# Altium PCB PCBProyectoFinal.PcbDoc
Units mil, origin at the board's own origin, x right, y up, seen from the top; angles counter-clockwise.
Board outline 3600 x 3600 mil, 2 copper layers (Top Layer, Bottom Layer); 53 components, 52 nets, 245 pads, 34 vias.
Unrouted connection lines stored in the file: 52.
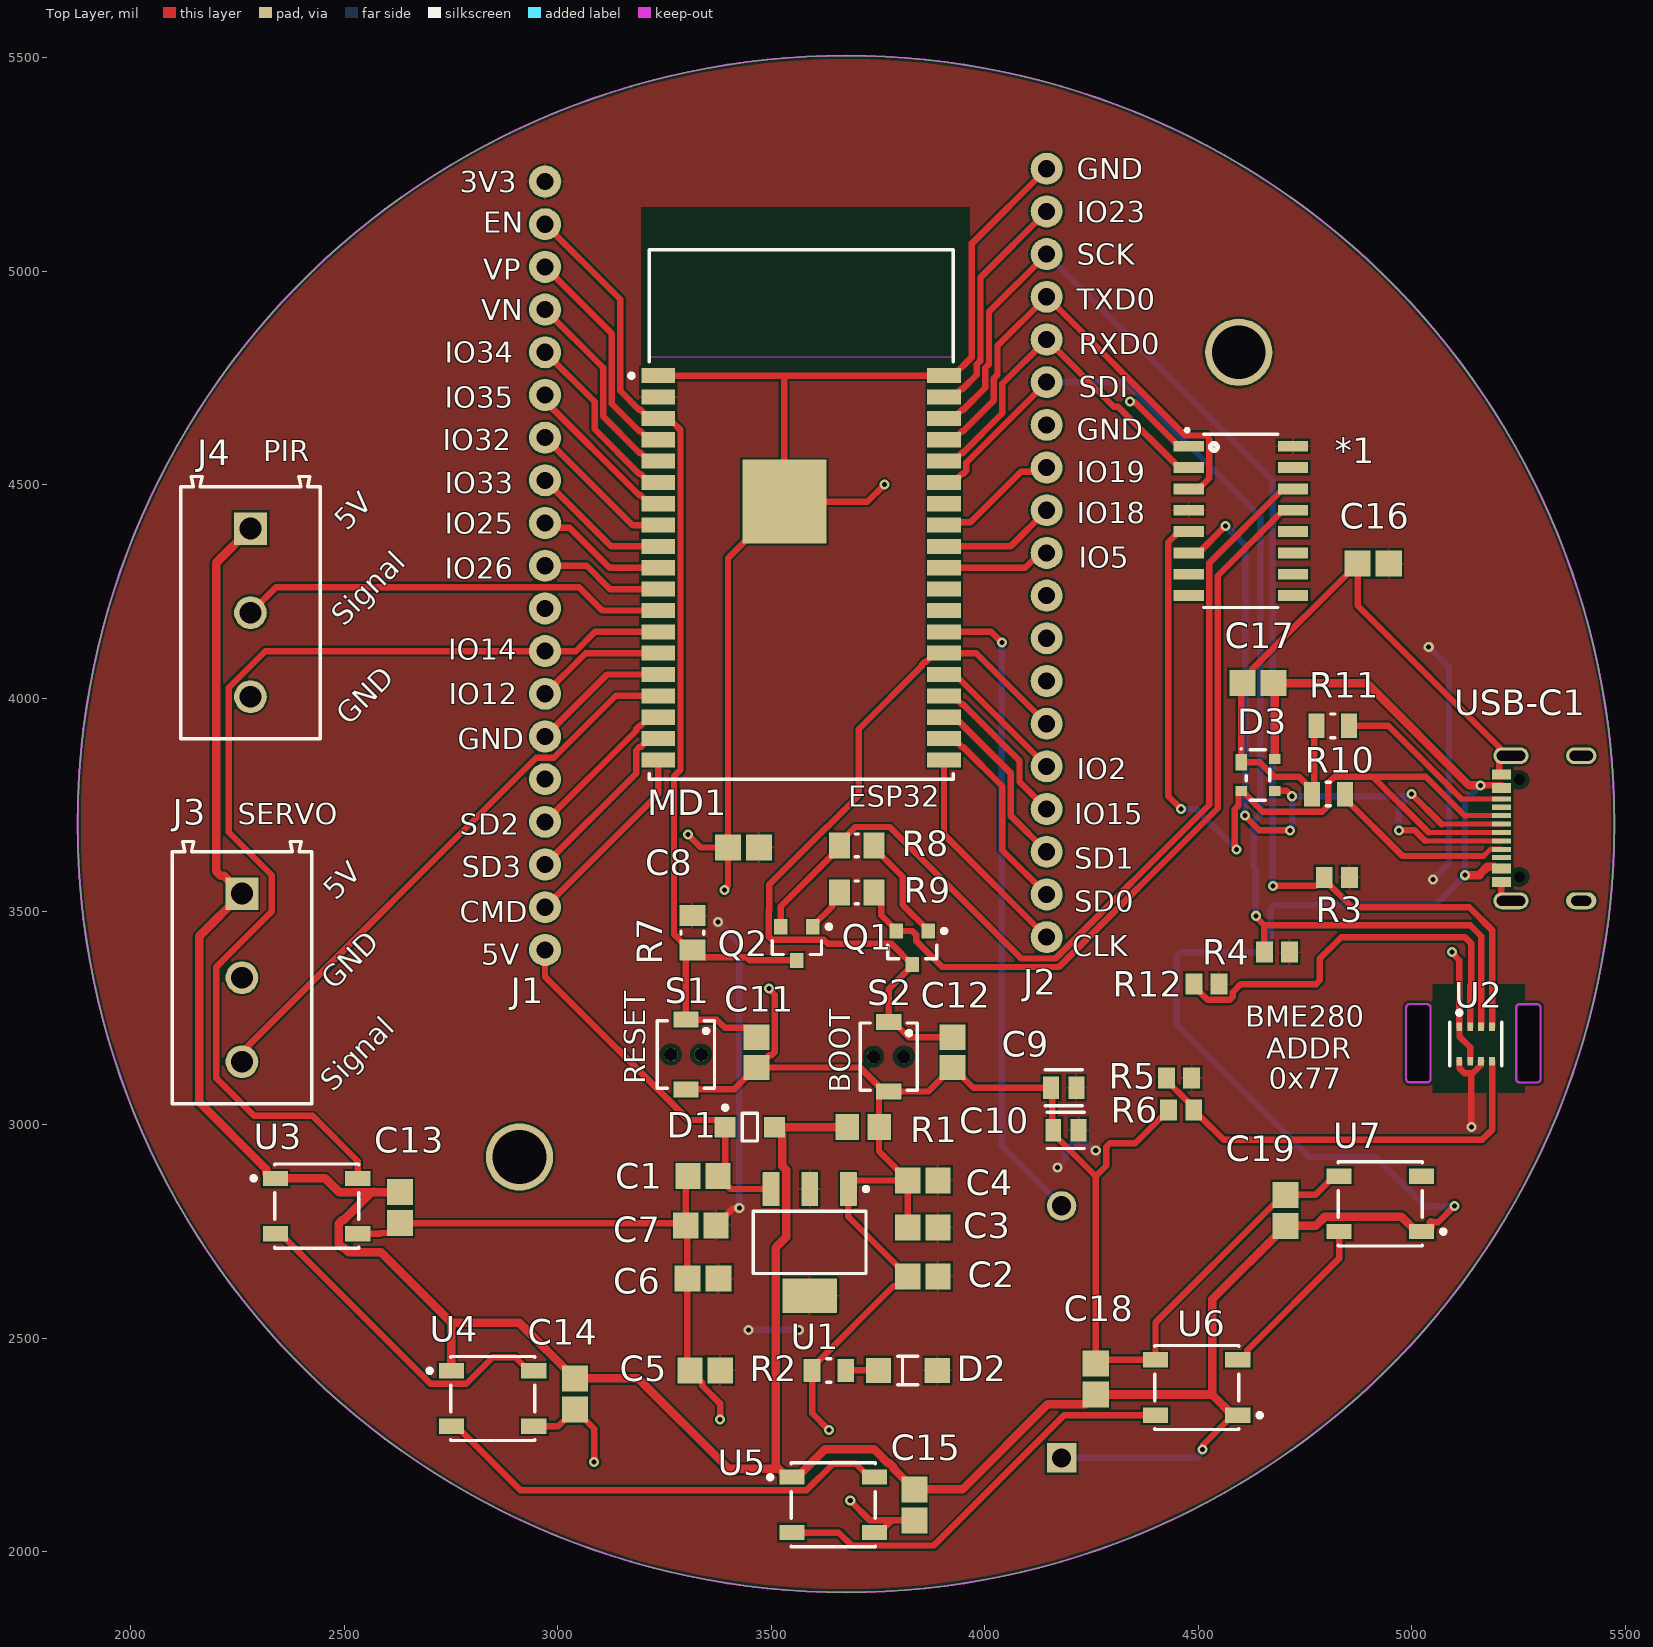
[diagram p0: Top Layer view]
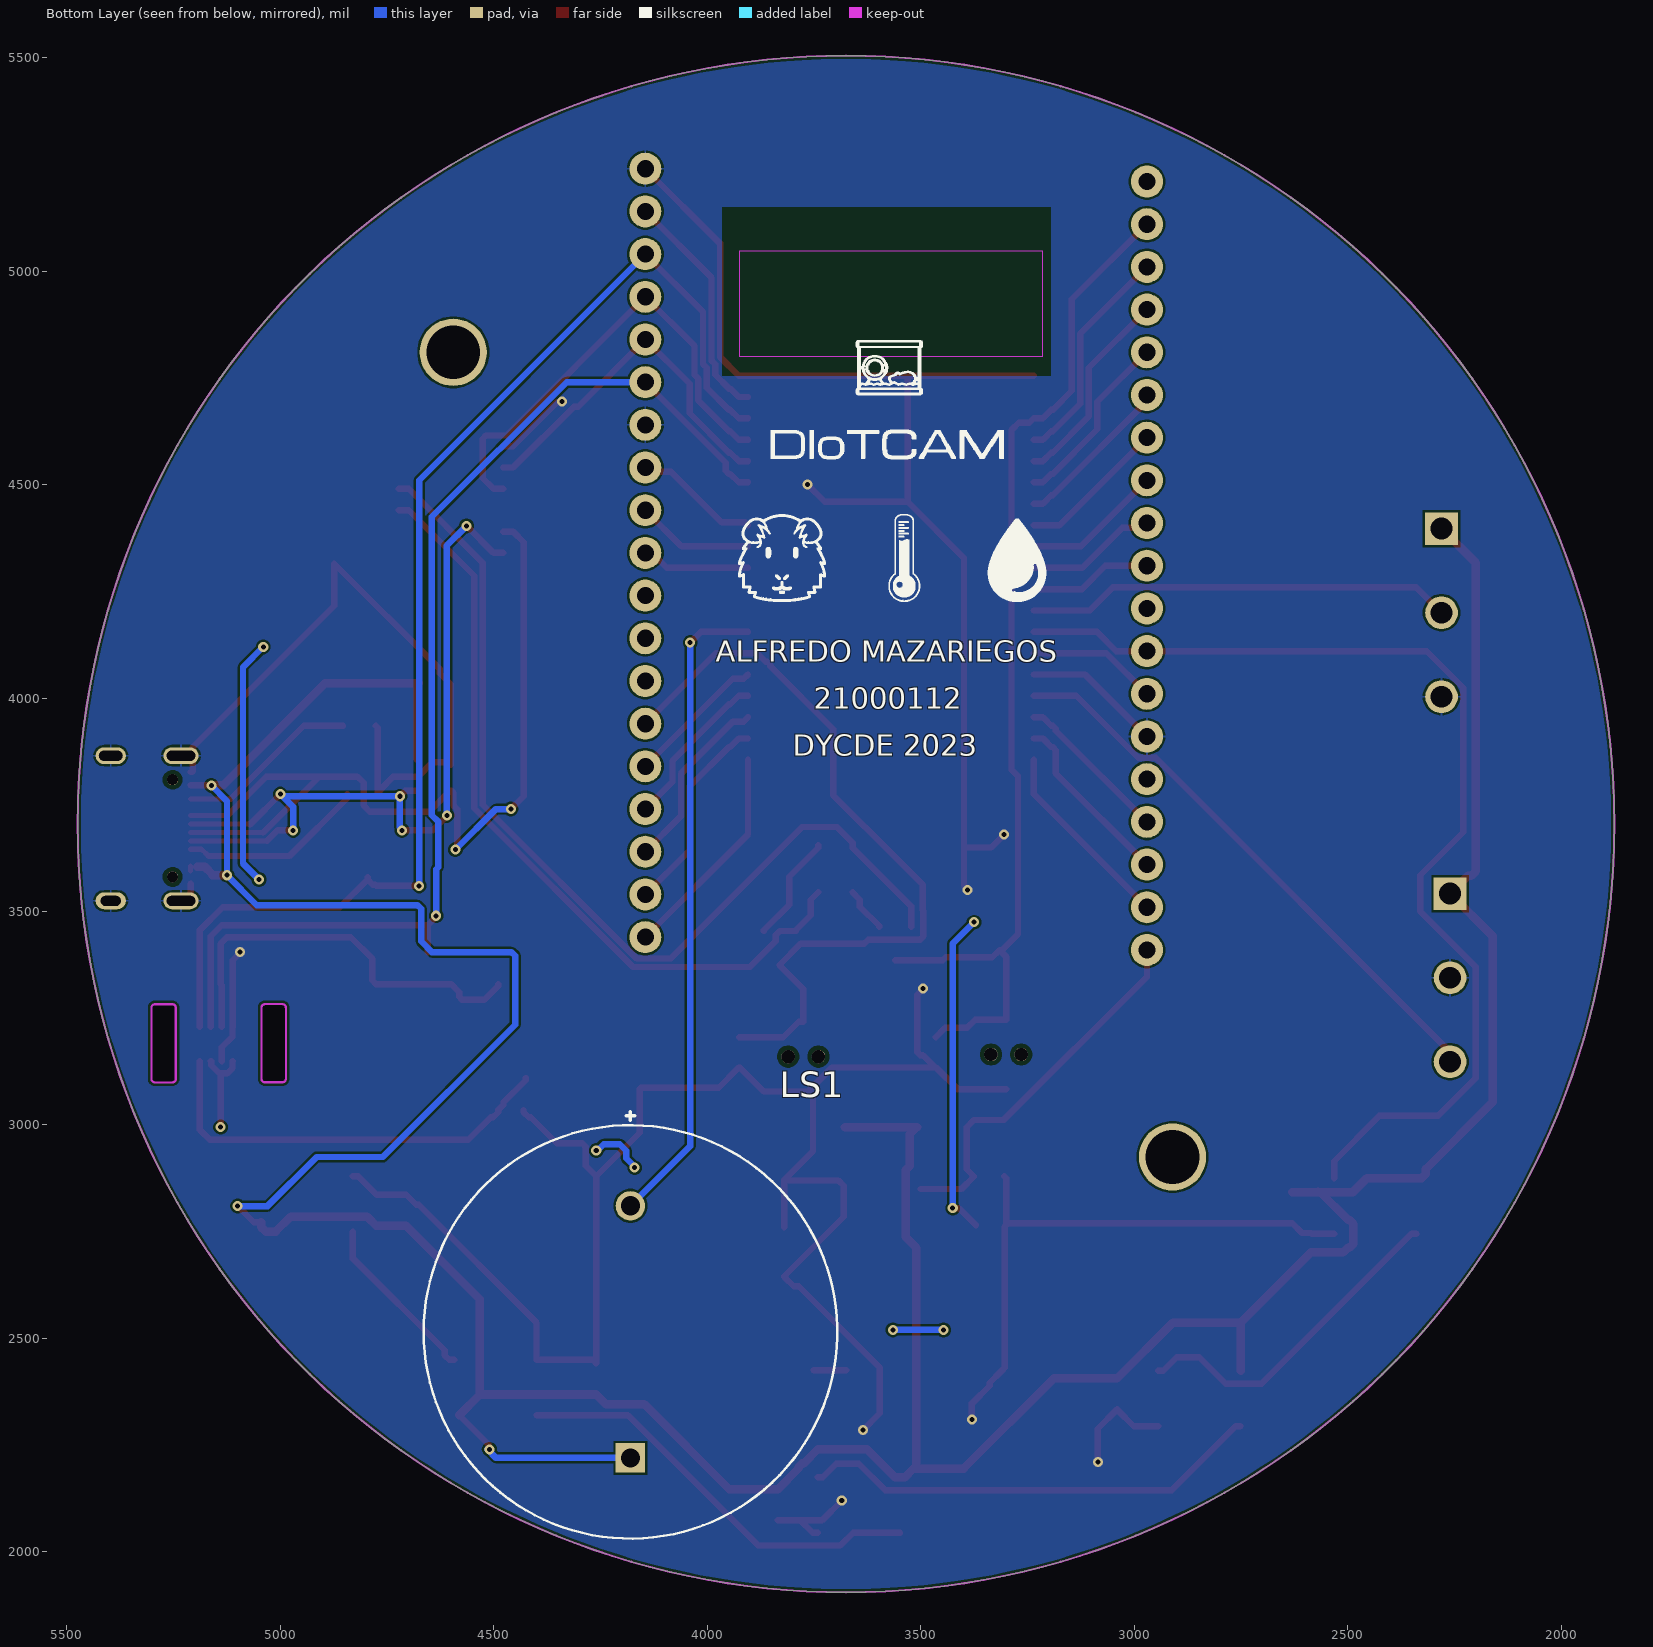
[diagram p1: Bottom Layer view, seen from below]
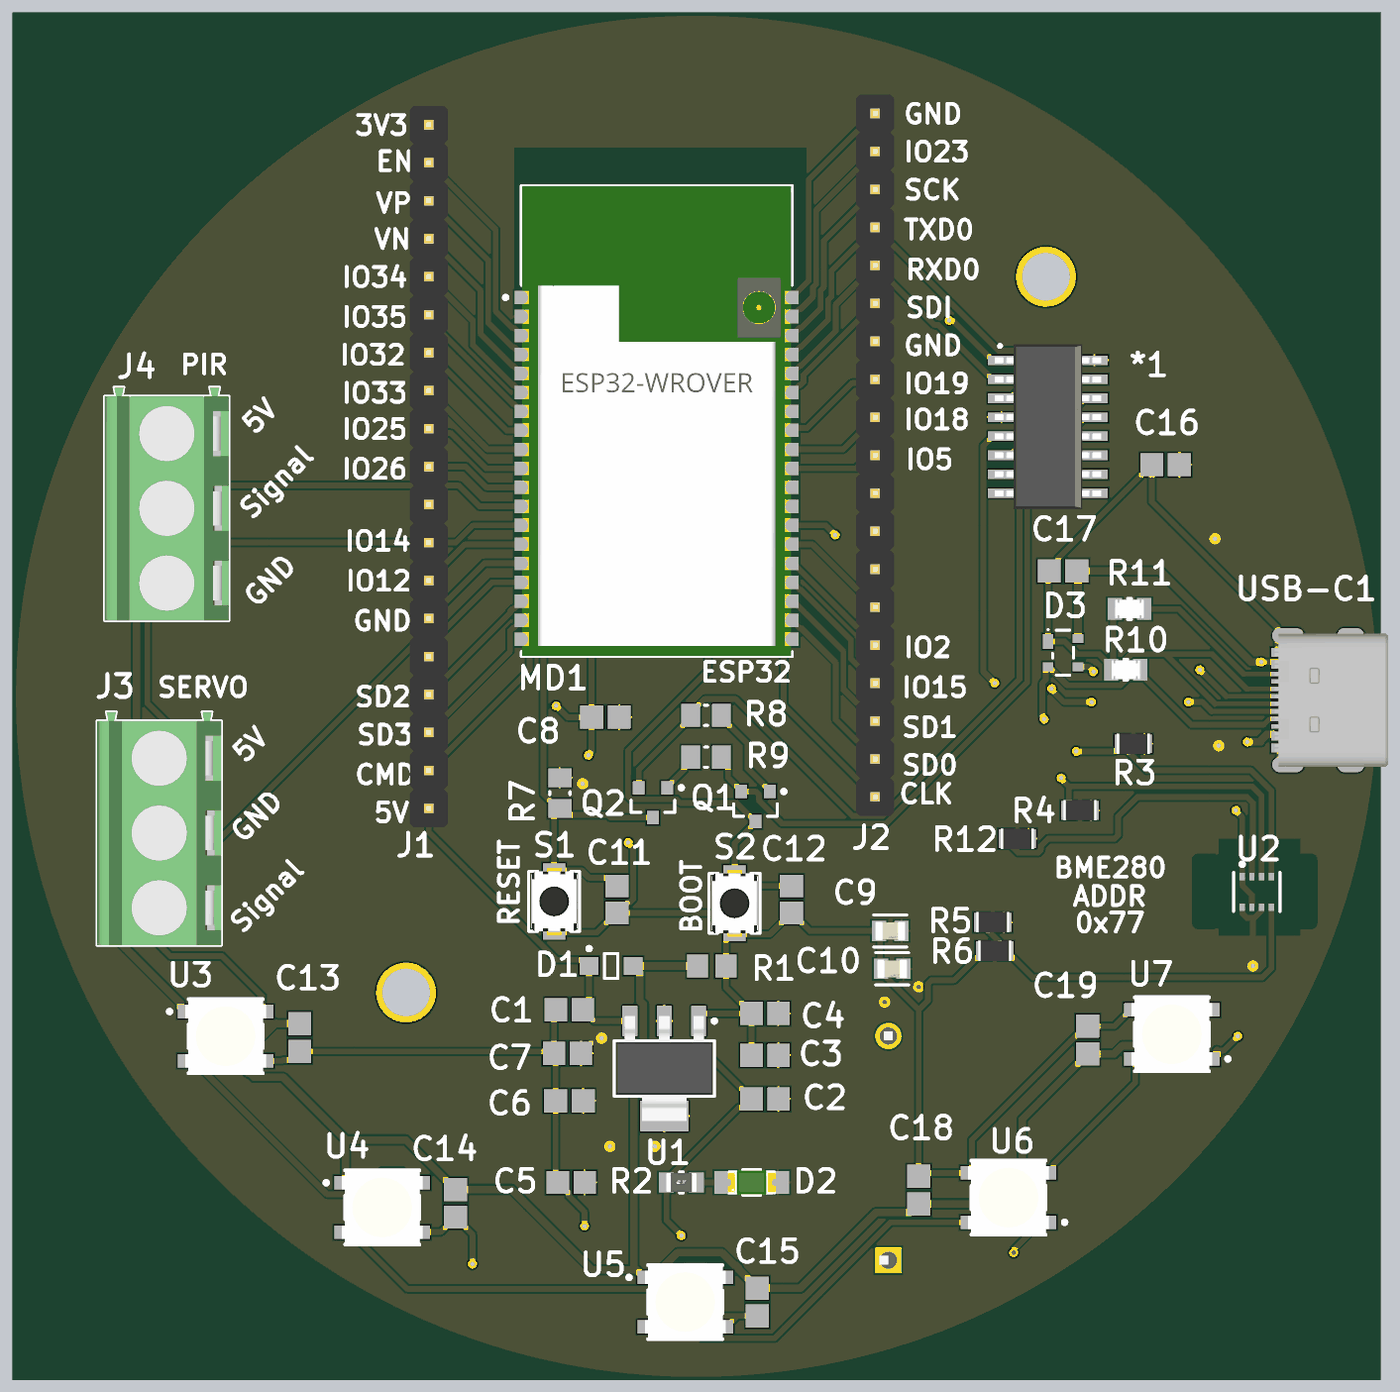
[diagram p2: 3D render of the assembled board from above, using the file's embedded part models]

## Layer stack, top to bottom
Top Solder: solder mask 0.4, Solder Resist, Dk 3.5
Top Layer: signal copper 1.4
Dielectric 1: dielectric 12.6, FR-4, Dk 4.8
Bottom Layer: signal copper 1.4
Bottom Solder: solder mask 0.4, Solder Resist, Dk 3.5

## Board outline
3675,1905 cw(c3675,3705) 1875,3705 cw(c3675,3705) 3675,5505 cw(c3675,3705) 5475,3705 cw(c3675,3705)
cut-out: 5245.01,3107.24 cw(c5252.95,3107.64) 5245,3107.64 5245,3275 cw(c5252.93,3275) 5245.01,3275.41 cw(c5252.83,3275) 5245.06,3275.95 cw(c5252.8,3275) 5252.4,3282.79 cw(c5252.8,3275) 5252.8,3282.8 5294.18,3282.8 cw(c5294.19,3275.02) 5294.59,3282.79 cw(c5294.19,3275.04) 5295.14,3282.74 cw(c5294.18,3275) 5301.97,3275.4 cw(c5294.19,3275) 5301.98,3275 5301.98,3107.64 cw(c5294.2,3107.63) 5301.97,3107.23 cw(c5294.16,3107.63) 5301.92,3106.68 cw(c5294.18,3107.64) 5294.58,3099.85 cw(c5294.18,3107.78) 5294.18,3099.84 5252.8,3099.84 cw(c5252.8,3107.76) 5252.39,3099.85 cw(c5252.79,3107.68) 5251.85,3099.9 cw(c5252.8,3107.64)
cut-out: 4987.21,3107.4 ccw(c4995,3107.8) 4994.05,3100.06 ccw(c4995,3107.86) 4994.59,3100.01 ccw(c4995,3107.87) 4995,3100 5036.38,3100 ccw(c5036.38,3107.93) 5036.78,3100.01 ccw(c5036.38,3107.8) 5044.12,3106.85 ccw(c5036.36,3107.79) 5044.17,3107.39 ccw(c5036.46,3107.79) 5044.18,3107.8 5044.18,3275.16 ccw(c5036.25,3275.16) 5044.17,3275.56 ccw(c5036.38,3275.16) 5037.34,3282.9 ccw(c5036.39,3275.15) 5036.79,3282.95 ccw(c5036.39,3275.25) 5036.38,3282.96 4995,3282.96 ccw(c4995,3275.19) 4994.6,3282.95 ccw(c4995,3275.16) 4987.26,3276.12 ccw(c4995.09,3275.16) 4987.21,3275.57 ccw(c4995.06,3275.16) 4987.2,3275.16 4987.2,3107.8 ccw(c4995.13,3107.8)

## Design rules (kind name [scope] priority, off if disabled: settings)
BoardOutlineClearance [All] p1: gap=7.87 ignorepadtopadclearanceinfootprint=FALSE
Clearance [All] p1: gap=5 ignorepadtopadclearanceinfootprint=FALSE except(9.84: Arc-Hole Track-Hole SMDPad-Hole THPad-Hole Via-Hole Fill-Hole Poly-Hole Region-Hole Text-Hole)
DiffPairsRouting [All] p1: maxlimit=10 minlimit=5 mostfreqgap=5 toplayer_minwidth=5 toplayer_maxwidth=1000 toplayer_prefwidth=5 bottomlayer_minwidth=5 bottomlayer_maxwidth=1000 bottomlayer_prefwidth=5 maxuncoupledlength=500
HoleSize [All] p1: absolutevalues=TRUE maxlimit=248.03 minlimit=11.81 maxpercent=80.000 minpercent=20.000
HoleToHoleClearance [All] p1: gap=9.84 allowstackedmicrovias=FALSE
MinimumAnnularRing [All] p1: minimumring=3
MinimumSolderMaskSliver [All] p1: minsoldermaskwidth=0
PlaneClearance [All] p1: clearance=5
PlaneConnect PlaneConnectPowerPads [InPadClass('PowerPads')] p1: planeconnectstyle=Direct reliefexpansion=20 reliefentries=4 reliefconductorwidth=10 reliefairgap=10
PlaneConnect [All] p2: pad.planeconnectstyle=Relief pad.reliefexpansion=11.81 pad.reliefentries=4 pad.reliefconductorwidth=5 pad.reliefairgap=5 via.planeconnectstyle=Direct via.reliefexpansion=11.81 via.reliefentries=4 via.reliefconductorwidth=5 via.reliefairgap=5
PolygonConnect PolygonConnectPowerPads [All vs (InPadClass('PowerPads'))] p1: connectstyle=Direct reliefconductorwidth=10 reliefentries=4 polygonreliefangle="90 Angle" airgapwidth=10
PolygonConnect [All] p2: thpad.connectstyle=Relief thpad.reliefconductorwidth=5 thpad.reliefentries=4 thpad.polygonreliefangle="90 Angle" thpad.airgapwidth=5 smdpad.connectstyle=Relief smdpad.reliefconductorwidth=5 smdpad.reliefentries=4 smdpad.polygonreliefangle="90 Angle" smdpad.airgapwidth=5 via.connectstyle=Direct via.reliefconductorwidth=5 via.reliefentries=4 via.polygonreliefangle="90 Angle" via.airgapwidth=5
RoutingVias [All] p1: holewidth=11.81 width=23.62 viastyle="Through Hole" minholewidth=11.81 minwidth=23.62 maxholewidth=23.62 maxwidth=259.84
SilkToSilkClearance [All] p1: silktosilkclearance=0
SilkToSolderMaskClearance [IsPad] p1: minsilkscreentomaskgap=5 clearancetoexposedcopper=TRUE
SolderMaskExpansion [All] p1: expansion=2.95 istentingtop=FALSE
Width [All] p1: maxlimit=1000 minlimit=5 preferedwidth=15 minimp=50.000000 maximp=50.000000 favimp=50.000000
22 further rules are at their usual default settings.

## Classes and differential pairs
component class USB-C: *1 C16 C17 D3 R10 R11 USB-C1
component class Regulación: C1 C2 C3 C4 C5 C6 C7 D1 D2 R1 R2 U1
component class ESP32: C8 C9 C10 C11 C12 C13 C14 C15 C18 C19 J1 J2 J3 J4 LS1 MD1 Q1 Q2 R3 R4 R5 R6 R7 R8 R9 R12 S1 S2 U2 U3 U4 U5 U6 U7

## Components (designator, comment, footprint, x,y, rotation, side; value= is the part's Value field where it differs from the comment)
*1 "CH340B" CH340B 4600,4415 r0 top locked
C1 "10µF" CAPC2013X140X50ML20T25 3340,2880 r0 top
C2 "10µF" CAPC2013X140X50ML20T25 3855,2645 r0 top
C3 "1µF" CAPC2013X145X50ML20T25 3855,2760 r0 top
C4 "10µF" CAPC2013X140X50ML20T25 3855,2870 r0 top
C5 "C0805C106K4PACTU" CAPC2013X140X50ML20T25 3345,2425 r0 top
C6 "0.1 uF" CAPC2013X94X50ML20T25 3340,2640 r0 top
C7 "C0805C106K4PACTU" CAPC2013X140X50ML20T25 3335,2765 r0 top
C8 "0.1 uF" CAPC2013X94X50ML20T25 3435,3650 r0 top
C9 "100nF" FP-C0805C-DN-MFG 4185,3087.32 r180 top value="0.10 μF"
C10 "100nF" FP-C0805C-DN-MFG 4190,2987.32 r180 top value="0.10 μF"
C11 "10µF" CAPC2013X145X50ML20T25 3465,3170 r90 top
C12 "1µF" CAPC2013X145X50ML20T25 3925,3170 r90 top
C13 "0.1 uF" CAPC2013X94X50ML20T25 2630,2806.42 r90 top
C14 "0.1 uF" CAPC2013X94X50ML20T25 3040,2370 r90 top
C15 "0.1 uF" CAPC2013X94X50ML20T25 3835,2110 r90 top
C16 "08055C104KAT2A" CAPC2013X94X50ML20T25 4910,4315 r0 top
C17 "08055C104KAT2A" CAPC2013X94X50ML20T25 4640,4035 r0 top
C18 "0.1 uF" CAPC2013X94X50ML20T25 4260,2405 r270 top
C19 "0.1 uF" CAPC2013X94X50ML20T25 4705,2800 r270 top
D1 "MBR120ESFT1G" ONSC-SOD-123FL-2-498_V 3450,2995 r0 top
D2 "HSMG-C150" FP-HSMG-C150-MFG 3820,2425 r0 top
D3 "PRTR5V0U2X,215" NXP-SOT143B-4_V 4640,3820 r0 top
J1 "PH1-19-UA" PH1-19-UA 2970,5210 r270 top locked
J2 "PH1-19-UA" PH1-19-UA 4145,5240 r270 top locked
J3 "691213710003" 691213710003 2260,3345 r270 top locked
J4 "691213710003" 691213710003 2280,4200 r270 top locked
LS1 "PKB24SPCH3601-B0" FP-PKB24SPCH3601-B0-MFG 4180,2515.28 r90 bottom locked
MD1 "ESP32-WROVER-I" FP-ESP32-WROVER-I-MFG 3570,4430 r0 top locked
Q1 "MMBT2222ALT1G" ONSC-SOT-23-3-318-08_V 3830,3415 r270 top locked
Q2 "MMBT2222ALT1G" ONSC-SOT-23-3-318-08_V 3560,3425 r270 top locked
R1 "100k" RESC2013X60X40ML20T25 3715,2995 r180 top
R2 "RP73D2A80R6BTG" FP-RP732A-MFG 3635,2425 r0 top value=80.6Ω
R3 "10k" RESC2013X60X40LL20T25_A 4825,3580 r0 top
R4 "10k" RESC2013X60X40LL20T25_A 4684.53,3405 r0 top
R5 "10k" RESC2013X60X40LL20T25_A 4455,3110 r0 top
R6 "0" RESC2013X60X40LL20T25_A 4460,3035 r0 top
R7 "10 k" RESC2013X60X30ML20T20 3315,3450 r90 top
R8 "10 k" RESC2013X60X30ML20T20 3700,3655 r180 top
R9 "10 k" RESC2013X60X30ML20T20 3700,3545 r0 top
R10 "5.1K" FP-CRCW0805-e3-MFG 4805,3775 r0 top
R11 "5.1K" FP-CRCW0805-e3-MFG 4815,3935 r0 top
R12 "10k" RESC2013X60X40LL20T25_A 4519.53,3330 r0 top
S1 "PTS820J25MSMTRLFS" SMT_SW_PTS_820 3300,3165 r270 top locked
S2 "IO0" SMT_SW_PTS_820 3775,3160 r270 top locked
U1 "LM1117MPX-3.3/NOPB" DCY0004A_M 3590,2725 r270 top
U2 "BME280" FP-BME280-MFG 5150,3190 r90 top
U3 "1655" ADA-RGB-1655_V 2435,2810 r0 top locked
U4 "1655" ADA-RGB-1655_V 2847.27,2359.14 r0 top locked
U5 "1655" ADA-RGB-1655_V 3645,2110 r0 top locked
U6 "1655" ADA-RGB-1655_V 4496.46,2384.96 r180 top locked
U7 "1655" ADA-RGB-1655_V 4926.46,2815.04 r180 top locked
USB-C1 "U262-161N-4BVC11" U262-161N-4BVC11 5355,3695 r90 top locked

## Footprints (in the part's own frame and the unit in brackets; to place one, negate y for a bottom-side part, rotate by r counter-clockwise, add the part's x,y. Pads: shape width x height; smd on the part's side, far side on the other; paste and mask are expansions set on the pad)
691213710003 [mm] "5,00mm - modular - green - Horizontal entry with rising cage clamp -  10,0mm height - 03p"
  rect 1.95x1.95 hole 1.3: 1(-5,0)
  round 1.95 hole 1.3: 2(0,0) 3(5,0)
  silkscreen extent -8.1,-4.15 7.5,4.15, body extent -8.1,-4.15 7.5,4.15, height 10.05
ADA-RGB-1655_V [mm] "SMD, 4-Leads, Body 5x5mm"
  rect 1.5x0.9 smd: 1(-2.45,1.65) 2(-2.45,-1.65) 3(2.45,-1.65) 4(2.45,1.65)
  silkscreen extent -3.87,-2.5 2.5,2.5, body extent -2.7,-2.5 2.7,2.5, height 1.68
CAPC2013X94X50ML20T25 [mm] "Chip Capacitor, 2-Leads, Body 2.01x1.25mm, IPC Low Density"
  rect 1.55x1.55 smd: 1(-0.925,0) 2(0.925,0)
  body extent -1.1,-0.72 1.11,0.72, height 0.94
CAPC2013X140X50ML20T25 [mm] "Chip Capacitor, 2-Leads, Body 2.00x1.25mm, IPC Low Density"
  rect 1.5x1.55 smd: 1(-0.9,0) 2(0.9,0)
  body extent -1.1,-0.72 1.1,0.72, height 1.4
CAPC2013X145X50ML20T25 [mm] "Chip Capacitor, 2-Leads, Body 2.00x1.25mm, IPC Low Density"
  rect 1.5x1.55 smd: 1(-0.9,0) 2(0.9,0)
  body extent -1.1,-0.72 1.1,0.72, height 1.45
CH340B [mm] "- USB 2.0 Transceiver 2Mbps SOP-16_150mil USB ICs ROHS"
  rect 1.8x0.64 smd: 1(-3.105,4.445) 2(-3.105,3.175) 3(-3.105,1.905) 4(-3.105,0.635) 5(-3.105,-0.635) 6(-3.105,-1.905) 7(-3.105,-3.175) 8(-3.105,-4.445) 9(3.105,-4.445) 10(3.105,-3.175) 11(3.105,-1.905) 12(3.105,-0.635) 13(3.105,0.635) 14(3.105,1.905) 15(3.105,3.175) 16(3.105,4.445)
  silkscreen extent -3.3,-5.15 2.2,5.5, body extent -3.56,-5.51 3.56,5.51, height 2.14
DCY0004A_M [mm] "SOT223, 4-Leads, Body 6.7x3.7mm, Pitch 2.3mm, IPC Low Density"
  rrect10% 2.05x1 smd: 1(-3.175,2.3) 2(-3.175,0) 3(-3.175,-2.3)
  rrect5% 2.05x3.25 smd: 4(3.175,0)
  silkscreen extent -3.3,-3.35 1.85,3.48, body extent -3.5,-3.25 3.5,3.25, height 1.62
FP-BME280-MFG [mm]
  rect 0.5x0.35 smd paste+0 mask+0: 1(1.025,0.975) 2(1.025,0.325) 3(1.025,-0.325) 4(1.025,-0.975) 5(-1.025,-0.975) 6(-1.025,-0.325) 7(-1.025,0.325) 8(-1.025,0.975)
  silkscreen extent -1.3,-1.55 1.97,1.55
FP-C0805C-DN-MFG [mm]
  rect 0.95x1.35 smd paste+0 mask+0: 1(-0.75,0) 2(0.75,0)
  silkscreen extent -1.1,-1.07 1.1,1.07, body extent -1.4,-0.85 1.4,0.85, height 0.25
FP-CRCW0805-e3-MFG [mm]
  rect 0.95x1.45 smd paste+0 mask+0: 1(-0.975,0) 2(0.975,0)
  silkscreen extent -0.13,-0.7 0.13,0.7, body extent -1.55,-0.82 1.55,0.82, height 0.25
FP-ESP32-WROVER-I-MFG [mm]
  rect 2x0.9 smd paste+0 mask+0: 1(-8.5,8.26) 2(-8.5,6.99) 3(-8.5,5.72) 4(-8.5,4.45) 5(-8.5,3.18) 6(-8.5,1.91) 7(-8.5,0.64) 8(-8.5,-0.63) 9(-8.5,-1.9) 10(-8.5,-3.17) 11(-8.5,-4.44) 12(-8.5,-5.71) 13(-8.5,-6.98) 14(-8.5,-8.25) 15(-8.5,-9.52) 16(-8.5,-10.79) 17(-8.5,-12.06) 18(-8.5,-13.33) 19(-8.5,-14.6) 20(8.5,-14.6) 21(8.5,-13.33) 22(8.5,-12.06) 23(8.5,-10.79) 24(8.5,-9.52) 25(8.5,-8.25) 26(8.5,-6.98) 27(8.5,-5.71) 28(8.5,-4.44) 29(8.5,-3.17) 30(8.5,-1.9) 31(8.5,-0.63) 32(8.5,0.64) 33(8.5,1.91) 34(8.5,3.18) 35(8.5,4.45) 36(8.5,5.72) 37(8.5,6.99) 38(8.5,8.26)
  rect 5x5 smd paste+0 mask+0: 39(-1,0.76)
  Keep-Out Layer region: -9,9.4 9,9.4 9,15.7 -9,15.7
  Keep-Out Layer region: -9,9.4 9,9.4 9,15.7 -9,15.7
  silkscreen extent -10.22,-15.75 9.05,15.75, body extent -9.6,-15.85 9.6,15.85, height 0.25
FP-HSMG-C150-MFG [mm]
  rect 1.5x1.5 smd paste+0 mask+0: 1(-1.75,0) 2(1.75,0)
  silkscreen extent -0.6,-0.85 0.6,0.85, body extent -2.6,-0.95 2.6,0.95, height 0.25
FP-PKB24SPCH3601-B0-MFG [mm]
  rect 1.75x1.75 hole 1.15 paste-1000 mask+0: 1(-7.5,0)
  round 1.75 hole 1.15 paste-1000 mask+0: 2(7.5,0)
  silkscreen extent -12.3,-12.3 13.1,12.3, body extent -12.15,-12.69 12.15,12.69, height 10
FP-RP732A-MFG [mm]
  rect 1x1.35 smd paste+0 mask+0: 1(-1,0) 2(1,0)
  silkscreen extent -0.13,-0.7 0.13,0.7, body extent -1.6,-0.8 1.6,0.8, height 0.25
NXP-SOT143B-4_V [mm] "SOT143, 4-Leads, Body 3x1.4mm"
  rect 0.7x1 smd: 1(-1,0.75)
  rect 0.7x0.6 smd: 2(-1,-0.95) 3(1,-0.95) 4(1,0.95)
  silkscreen extent -1.05,-1.5 0.7,1.6, body extent -0.7,-1.5 0.7,1.5, height 1.1
ONSC-SOD-123FL-2-498_V [mm] "SOD, 2-Leads, Body 2.7x1.65mm"
  rect 1.25x1.22 smd: 1(-1.475,0) 2(1.475,0)
  silkscreen extent -1.6,-0.82 0.45,1.28, body extent -1.35,-0.82 1.35,0.82, height 0.98
ONSC-SOT-23-3-318-08_V [mm] "SOT23, 3-Leads, Body 2.92x1.3mm, Pitch 0.95mm"
  rect 0.9x0.8 smd: 1(-1,0.95) 2(-1,-0.95) 3(1,0)
  silkscreen extent -1.12,-1.46 0.65,2.03, body extent -0.65,-1.46 0.65,1.46, height 1.11
PH1-19-UA [mm] "Connector Header Through Hole 19 position 0.100\" (2.54mm)"
  round 1.905 hole 1.02: 1(0,0) 2(2.54,0) 3(5.08,0) 4(7.62,0) 5(10.16,0) 6(12.7,0) 7(15.24,0) 8(17.78,0) 9(20.32,0) 10(22.86,0) 11(25.4,0) 12(27.94,0) 13(30.48,0) 14(33.02,0) 15(35.56,0) 16(38.1,0) 17(40.64,0) 18(43.18,0) 19(45.72,0)
  body extent -1.27,-1.27 46.99,1.27, height 8.54
RESC2013X60X30ML20T20 [mm] "Chip Resistor, 2-Leads, Body 2.00x1.25mm, IPC Low Density"
  rect 1.25x1.55 smd: 1(-1.025,0) 2(1.025,0)
  silkscreen extent -0.1,-0.67 0.1,0.67, body extent -1.1,-0.72 1.1,0.72, height 0.6
RESC2013X60X40LL20T25_A [mm] "Chip Resistor, 2-Leads, Body 2.20x1.35mm, IPC High Density"
  rect 1x1.25 smd: 1(-0.75,0) 2(0.75,0)
  body extent -1.1,-0.67 1.1,0.67, height 0.6
RESC2013X60X40ML20T25 [mm] "Chip Resistor, 2-Leads, Body 2.00x1.25mm, IPC Low Density"
  rect 1.4x1.55 smd: 1(-0.95,0) 2(0.95,0)
  body extent -1.1,-0.72 1.1,0.72, height 0.6
SMT_SW_PTS_820 [mm]
  rect 0.95x1.5 smd: 1(-2.075,0) 2(2.075,0)
  round 0.8 hole 0.8 unplated: MH1(0,0.9) MH2(0,-0.9)
  silkscreen extent -2,-1.7 2,1.7, body extent -2.25,-1.55 2.25,1.55, height 2.05
U262-161N-4BVC11 [mm] "USB-C"
  rect 0.3x1.15 smd: A1(-3.35,3.67) A4(-2.55,3.67) A5(-1.25,3.67) A6(-0.25,3.67) A7(0.25,3.67) A8(1.25,3.67) A9(2.55,3.67) A12(3.35,3.67) B1(3.05,3.67) B4(2.25,3.67) B5(1.75,3.67) B6(0.75,3.67) B7(-0.75,3.67) B8(-1.75,3.67) B9(-2.25,3.67) B12(-3.05,3.67)
  rrect100% 1x1.8 hole 1.2 slot 0.6 at 0 deg: S1(-4.32,-1.075)
  rrect100% 1x1.8 on Top Paste: S1(-4.318,-1.092) S1(4.318,-1.067)
  rrect100% 1x2.1 hole 1.7 slot 0.6 at 0 deg: S2(-4.32,3.105) S3(4.32,3.105)
  rrect100% 1x2.1 on Top Paste: S2(-4.318,3.124) S2(4.318,3.124)
  rrect100% 1x1.8 hole 1.4 slot 0.6 at 0 deg: S4(4.32,-1.075)
  round 0 / inner round 0.65 / far side round 0.65 hole 0.65: Un1(2.89,2.605) Un2(-2.89,2.605)
  body extent -4.45,-3.55 4.45,4.01, height 3.33

## Part data
*1: "- USB 2.0 Transceiver 2Mbps SOP-16_150mil USB ICs ROHS", ComponentLink1Description=Datasheet, ComponentLink1URL=https://www.mpja.com/download/35227cpdata.pdf
C1 C2 C4 C5 C7: library part CMP-2007-03242-1, "10µF ±10% 16V Ceramic Capacitor X5R 0805 (2012 Metric)", Part Number=CL21A106KOQNNNG
C3 C11 C12: library part CMP-2007-01082-1, "1µF ±10% 16V Ceramic Capacitor X7R 0805 (2012 Metric)", Manufacturer=Kemet, Part Number=C0805C105K4RAC7800
C6 C8 C13 C14 C15 C16 C17 C18 C19: library part CMP-2000-05016-1, "Chip Capacitor, Ceramic, 0.1 uF, 10%, 50 V, 0805, RoHS, Tape and Reel", Capacitance=100nF, Case Size/Dimension=0805, Dielectric=X7R, Manufacturer=AVX, Rated Voltage=50V, Tolerance (%)=±10%, Datasheet URL=http://www.farnell.com/datasheets/319609.pdf, Datasheet Version=Sep-07, Manufacturer URL=http://www.avx.com/
C9 C10: library part CMP-2007-00279-2, "CAP CER 0.1UF 50V X7R 0805 C0805C104K5RACTU", Capacitance="0.10 μF", Manufacturer=KEMET, Manufacturer Part Number=C0805C104K5RACTU, Package=C0805C-DN, Temperature="-55°C to +125°C", Temperature Characteristic=X7R, Temperature Coefficient=30ppm/°C, Temperature Range High=+125°C, Temperature Range Low=-55°C, Tolerance=0.1, Voltage Rating="50 V", Automotive=No, Category=Cap, ComponentLink2Description=Datasheet, ComponentLink2URL=https://content.kemet.com/datasheets/KEM_C1003_C0G_SMD.pdf, Device Class L1="Passive Components", Device Class L2=Capacitors, Device Class L3="Ceramic Capacitors", Digikey Description="CAP CER 0.1UF 50V X7R 0805", Height=0.88mm, Ipc Land Pattern Name=CAPC200125X78, Lead Free=Yes, Material=Ceramic, Mouser Description="Cap Ceramic 0.1uF 50V X7R 10% SMD 2.0 x 1.2 mm 125 C Paper T/R", Octopart=https://octopart.com/c0805c104k5ractu-kemet-143926, RoHS=TRUE
D1: library part CMP-1055-00434-1, "Schottky Power Rectifier, 2-Pin SOD-123, Pb-Free, Tape and Reel", Manufacturer="On Semiconductor", ComponentLink1Description="Manufacturer URL", ComponentLink1URL=http://www.onsemi.com/, ComponentLink2Description=Datasheet, ComponentLink2URL=http://www.onsemi.cn/pub_link/Collateral/MBR120ESFT1-D.PDF, ComponentLink3Description="Package Specification", ComponentLink3URL=http://www.onsemi.com/pub_link/Collateral/498-01.PDF, Configuration=Single, DatasheetVersion="Rev. 4", IFSM Max (A)=40, Mounting Technology="Surface Mount", PackageDescription="2-Pin SOD, Body 1.65 x 2.7 mm", PackageReference=SOD-123FL-2-498, PackageVersion="Rev. D, 05/2013", Packing="Tape and Reel", PartNumber=MBR120ESFT1G, RoHS=TRUE
D2: library part CMP-2000-05061-2, "LED GREEN DIFFUSED 1206 SMD", Colour=Green, Forward Current=20mA, Forward Voltage=2.2V, Manufacturer=Broadcom, Max Junction Temp=+95°C, Power Dissipation=65mW, Reverse Voltage=5V, Temperature="-40°C to +85°C", Temperature Range High=+85°C, Temperature Range Low=-40°C, Automotive=No, Category=Diode, ComponentLink2Description=Datasheet, ComponentLink2URL=https://docs.broadcom.com/docs/AV02-0551EN, Device Class L1=Optoelectronics, Device Class L2=LEDs, Device Class L3=unset, Digikey Description="LED GREEN DIFFUSED 1206 SMD", Height=1.2mm, Ipc Land Pattern Name=DIOCP320160X55, Lead Free=Yes, Led Orientation="Top View", Luminous Intensity=15mcd, Manufacturer Part Number=HSMG-C150, Mouser Description="LED Uni-Color Green 570nm 2-Pin Chip LED T/R", Octopart=https://octopart.com/hsmg-c150-broadcom-71131304, Package=HSMG-C150, Peak Emmision Wavelength=570nm, RoHS=TRUE, Viewing Angle=170°, Wavelength=572nm
D3: library part CMP-2000-05285-1, "Ultra Low Capacitance Double Rail-to-Rail ESD Protection Diode, 5.5 V, 1 pF, -40 to 85 degC, 4-Pin SOT143B, RoHS, Tape and Reel", Capacitance Value=16pF, ESD Protection Voltage=8KV@ContactDisc, Leakage Current=0.1uA, Manufacturer="NXP Semiconductors", Operating Temp Range=-40Cto85C, Operating Temperature Classification=Industrial, Operating Temperature Max Deg. C=85C, Operating Temperature Min Deg. C=-40C, Package / Case=SOT, Reverse Breakdown Voltage=6V, Reverse Stand-off Voltage=5.5V, Configuration=Quad, Datasheet URL=https://datasheet.ciiva.com/4479/prtr5v0u2x-102853-4479461.pdf, Datasheet Version="Rev. 02, 01/2008", Direction Type=Uni-Directional, Leakage Current (Max)=0.1uA, Manufacturer URL=http://www.nxp.com/, Mounting=SurfaceMount, Mounting Style=SurfaceMount, Number of Elements=1, Package Type=SOT, Packaging=TapeandReel, Pin Count=3+Tab, Polarity=Uni-Directional, Product Depth (mm)=1.4mm, Product Height (mm)=1mm, Product Length (mm)=3mm, Rad Hardened=No, Suppressor Type=DiodeArrays, Working Voltage=5.5V, Working Voltage (Max)=5.5V
J1 J2: "Connector Header Through Hole 19 position 0.100\" (2.54mm)", Supplier Part Number 1=2057-PH1-19-UA-ND, Supplier 1=Digi-Key
J3 J4: library part CMP-1502-02527-1, "Serie 213 - 5.00 mm Horizontal Entry Modular with RisingCage Clamp WR-TBL, 3 pin", Manufacturer="Wurth Elektronik", Operating Temperature=-40to105degC, Datasheet URL=http://katalog.we-online.de/em/datasheet/6912137100xx.pdf, Manufacturer URL=http://www.we-online.de, Mounting Technology=THT, Package Reference=691213710003, Packaging=Box, Part Number=691213710003, Pin Number=3, Pitch=5.00mm, Publisher=WurthElektronik
LS1: library part CMP-06203-000001-2, "AUDIO PIEZO TRANSDUCER 3-15V TH", Frequency=3.6kHz, Max Frequency=4.1kHz, Max Operating Temperature=70°C, Max Supply Current=16mA, Max Supply Voltage=15V, Min Operating Temperature=-20°C, Min Supply Voltage=3V, Nominal Supply Voltage (DC)=12V, Package Quantity=650, Diameter=24.3mm, Height=9.7mm, Lead Free="Lead Free", Length=24.3mm, Max Supply Voltage (DC)=15V, Min Supply Voltage (DC)=3V, Mount=Flush, Nominal Supply Current=16mA, Operating Supply Current=16mA, Packaging=Bulk, Radiation Hardening=No, REACH SVHC="No SVHC", Self Resonant Frequency=3.6kHz, Termination="PC Pins", Voltage Rating=12V, Voltage Rating (DC)=15V, Washable=No
MD1: library part CMP-194065-000001-1, "SMD MODULE, ESP32-D0WDQ6, 32MBIT", Manufacturer=Espressif, Max Frequency=2484MHz, Max Supply Voltage=3.6V, Min Supply Voltage=2.3V, Nominal Supply Current=500mA, Temperature="-40°C to +85°C", Temperature Range High=+85°C, Temperature Range Low=-40°C, Automotive=No, Category=UNK, ComponentLink2Description=Datasheet, ComponentLink2URL=https://www.espressif.com/sites/default/files/documentation/esp32-wrover_datasheet_en.pdf, Data Rate=150Mbits/s, Device Class L1="Integrated Circuits (ICs)", Device Class L2="RF Semiconductors and Devices", Device Class L3=Transceivers, Digikey Description="SMD MODULE, ESP32-D0WDQ6, 32MBIT", Height=3.4mm, Interface=I2C,SPI,UART,I2S,Other, Lead Free=Yes, Manufacturer Part Number=ESP32-WROVER-I, Number Of Adc Channels=16, Number Of Gpio=20, Octopart=https://octopart.com/esp32-wrover-i-espressif+systems-89171349, Package=ESP32-WROVER-I, RoHS=TRUE, Sensitivity=-98dBm
Q1 Q2: library part CMP-1048-00538-1, "General Purpose Transistor, NPN Silicon, 3-Pin SOT-23, Pb-Free, Tape and Reel", Manufacturer="On Semiconductor", ComponentLink1Description="Manufacturer URL", ComponentLink1URL=http://www.onsemi.com/, ComponentLink2Description=Datasheet, ComponentLink2URL=http://www.onsemi.cn/pub_link/Collateral/MMBT2222LT1-D.PDF, ComponentLink3Description="Package Specification", ComponentLink3URL=http://www.onsemi.cn/pub_link/Collateral/318-08.PDF, DatasheetVersion="Rev. 10", fT Min (MHz)=300, IC Continuous (A)=0.6, Mounting Technology="Surface Mount", PackageDescription="3-Pin Small Outline Transistor, Body 2.92 x 1.3 mm, Pitch 0.95 mm", PackageReference=SOT-23-3-318-08, PackageVersion="Rev. AP, 11/2009", Packing="Tape and Reel", PartNumber=MMBT2222ALT1G, Polarity=NPN, RoHS=TRUE
R1: library part CMP-2001-00583-1, "100 kOhms ±0.1% 0.125W, 1/8W Chip Resistor 0805 (2012 Metric) Automotive AEC-Q200 Thin Film", Manufacturer=Panasonic, Part Number=ERA6AEB104V
R2: library part CMP-03211-002377-1, "RESISTOR, 0805 80.6Ω, 0.1% 15ppm/°C", Manufacturer="TE Connectivity", Package=RP732A, Power Rating=0.125W, Resistance=80.6Ω, Temperature="-55°C to 155°C", Temperature Coefficient=15ppm/°C, Temperature Range High=155°C, Temperature Range Low=-55°C, Tolerance=0.1%, Voltage Rating=150V, Automotive=No, Category=Res, ComponentLink2Description=Datasheet, ComponentLink2URL=https://www.te.com/commerce/DocumentDelivery/DDEController?Action=srchrtrv&DocNm=1773272&DocType=DS&DocLang=English, Composition="Thin Film", Device Class L1="Passive Components", Device Class L2=Resistors, Device Class L3="Chip SMD Resistors", Height=0.65mm, Ipc Land Pattern Name=RESC200125X55, Lead Free=Yes, Manufacturer Part Number=RP73D2A80R6BTG, Octopart=https://octopart.com/rp73d2a80r6btg-te+connectivity-42011633, octopart_url=https://octopart.com/rp73d2a80r6btg-te+connectivity-42011633, Packaging="250 cut tape length", RoHS=TRUE, Series=RP73
R3 R4 R5 R6 R12: library part CMP-2001-00582-2, "Metal Film Chip Resistor, High Reliability Type, 0.125 W, +/- 0.1%, -55 to 155 degC, 0805 (2012 Metric), RoHS, Tape and Reel", Case Code - in=0805, Case Code - mm=2012, Manufacturer=Panasonic, Operating Temperature Range=-55Cto+155C, Package / Case=0805(2012metric), Package Description="2-Pin Surface Mount Device, Body 2 x 1.25 mm", Power Rating=125mW(1/8W), Resistance=10kOhms, Temperature Coefficient=25PPM/C, Tolerance=0.1%, Voltage Rating=100V, Brand=Panasonic, Datasheet URL=https://industrial.panasonic.com/cdbs/www-data/pdf/RDM0000/AOA0000C307.pdf, Datasheet Version=02/2016, Factory Pack Quantity=5000, Height=0.5mm, Length=2mm, Manufacturer URL=http://www.panasonic.com/, Mounting Technology=SurfaceMount, Package Reference=0805, Packaging=Reel, Product=ThinFilmResistorsSMD, Product Category=ThinFilmResistors-SMD, RoHS=Details, Series=ERA-6A, Termination Style=SMD/SMT, Type=MetalFilmChipResistors, Width=1.25mm
R7 R8 R9: library part CMP-2001-04657-1, "10 kOhms ±5% 0.25W, 1/4W Chip Resistor 0805 (2012 Metric) Automotive AEC-Q200, Moisture Resistant Thick Film", Manufacturer="KOA Speer", Part Number=RK73B2ATTD103J
R10 R11: library part CMP-2001-04024-2, "RES Thick Film, 5.1kΩ, 1%, 0.125W, 100ppm/°C, 0805", Case Code (Imperial)=0805, Case Code (Metric)=2012, Max Operating Temperature=155°C, Max Power Dissipation=125mW, Min Operating Temperature=-55°C, Package Quantity=10, Resistance=5.1kR, Temperature Coefficient=100ppm/°C, Tolerance=1%, Voltage Rating=150V, Case/Package=0805, Composition="Thick Film", Contact Plating=Tin, Depth=1.25mm, Features="Automotive AEC-Q200", Height=0.45mm, Lead Free="Lead Free", Length=2mm, Military Standard=Not, Mount="Surface Mount", Number of Terminations=2, Packaging="Tape and Reel", Power Rating=125mW, Radiation Hardening=No, Termination=SMD/SMT, Voltage Rating (DC)=150V, Weight=0.000194oz, Width=0.049inch
S2: library part PTS820J25MSMTRLFS
U1: library part CMP-0062-01639-4, "800mA Low-Dropout Linear Regulator, 4-pin SOT-223, Pb-Free", Manufacturer="Texas Instruments", PackageTopMarking=XYTT*N05A, PowerWise=N, Code_IPC=SOT223-4, Code_JEDEC=TO-261-AA, ComponentLink1Description="Datasheet URL", ComponentLink1URL=http://www.ti.com/general/docs/lit/getliterature.tsp?genericPartNumber=LM1117-N&fileType=pdf, CompType="LDO IC", High-Reliability=Y, PackageDescription="Molded SOT-223, 6.50 x 3.56 x 1.6mm Body, 4 Lead, 2.3mm Pitch", PackageReference=DCY0004A, PartNumber=LM1117MPX-3.3/NOPB, PinCount=4, RoHS=Y
U2: library part CMP-2000-05073-3, "SENSOR PRESSURE HUMIDITY TEMP", Case/Package=LGA, Max Operating Temperature=85°C, Min Operating Temperature=-40°C, Accuracy=3%, Lead Free="Lead Free", Mount="Surface Mount", Number of Pins=8, Output Type=SPI, Packaging="Cut Tape", Response Time=1s, Sensor Type=Temperature
U3 U4 U5 U6 U7: library part CMP-2000-05026-1, "Intelligent Control LED Integrated Light Source, 3.5 to 5.3 V, -25 to 80 degC, 4-Pin SMD, RoHS, Tape and Reel", Color=Red,Green,Blue(RGB), Manufacturer=Adafruit-Industries-LLC, Package Description="4-Pin Surface Mount Device, Body 5 x 5 mm", Category=Optoelectronics, Configuration=Discrete, Controller Type=-, Datasheet URL=http://datasheet.octopart.com/ADA1655-Adafruit-Industries-datasheet-32028139.pdf, Datasheet Version=May-13, Family=Addressable,Specialty, Interface=-, Manufacturer URL=https://www.adafruit.com/, Mounting Type=SurfaceMount, Number of LEDs=10, Package Reference=1655, Series=Neopixel, Size / Dimension=5.00mmLx5.00mmW, Utilized LED=WS2812(5050)
USB-C1: "USB - Type C Female 16 SMT USB Connectors RoHS", ComponentLink1Description=datasheet, ComponentLink1URL=https://datasheet.lcsc.com/szlcsc/2002271811_XKB-Connectivity-U262-161N-4BVC11_C319148.pdf, ComponentLink2Description="LCSC Link", ComponentLink2URL=https://lcsc.com/product-detail/USB-Connectors_XKB-Connectivity-U262-161N-4BVC11_C319148.html

## Free pads (board coordinates)
  round 157.48 hole 125.98: 1(4595,4810) 2(2910,2925)

## Via types
v1: diameter 23.62, hole 11.81, Top Layer to Bottom Layer, 34 vias

## Nets (pads, with @x,y where several pads share a name; then routed paths per layer and width w, separated by ;. In a path a pad name is that pad's centre, name@x,y a point inside that pad or via, vN(x,y) a via of type N, cw(c..) or ccw(c..) an arc to the next point about the centre after c; other vN are vias at no path point)
3V3: *1.4 *1.16 C2.2 C3.2 C4.2 C5.2 C6.2 C7.2 C8.2 C9.1 C10.1 C16.2 D2.2 J1.1 MD1.2 R3.2 R4.2 R5.2 R7.2 R12.2 U1.2 U1.4 U2.6 U2.8 | length 1808.1
  Top Layer w15: C7.2 3410.43,2805 v1(3425,2805) ; U2.8 5112.22,3149.04 5112.22,3132.78 5123.79,3121.21 5143.18,3121.21 ; v1(5140,2995) 5140,3118.03 5143.18,3121.21 ; U2.6 5162.19,3149.04 5162.19,3140.22 5143.18,3121.21
  Bottom Layer w15: v1(3375,3475) 3425,3425 v1(3425,2805) ; v1(3446.72,2519.72) 3447,2520 v1(3565,2520) ; v1(4170,2900) 4170,2902.33 4189.56,2921.9 4189.56,2939.56 4205,2955 4242.67,2955 4257.67,2940 v1(4260,2940) ; v1(5040,4120) 5087.45,4072.55 5087.45,3612.45 v1(5050,3575)
5v_ext: C1.2 D1.1 J1.19 U1.3 | length 889.3
  Top Layer w15: J1.19 2970,3347.4 3305.89,3011.52 3375.41,3011.52 D1.1 3391.93,2896.5 C1.2 3375.43,2879.02 3404.45,2850 U1.3
ADDR: R5.1 R6.2 U2.5 | length 1003.2
  Top Layer w15: R5.1 4425.47,3105.08 4477.34,3053.21 4477.34,3047.19 R6.2 4489.53,3030.08 4501.71,3017.89 4506.63,3017.89 4559.53,2965 5165,2965 5188.39,2988.39 U2.5
CLK: J2.19 MD1.20 | length 514.8
  Top Layer w15: MD1.20 3904.65,3680.35 J2.19
CMD: J1.18 MD1.19 | length 455.1
  Top Layer w15: J1.18 3235.35,3775.35 MD1.19
D+: *1.5 D3.2 USB-C1.A6 USB-C1.B6 | length 2100.5
  Top Layer w12: 5039.84,3685.16 USB-C1.A6 ; 5124.61,3724.53 USB-C1.B6
  Top Layer w15: v1(4460,3740) 4429.82,3770.18 4429.82,4364.9 4454.92,4390 *1.5 ; v1(4590,3645) 4590,3647.33 4585.69,3651.64 4585.69,3739.47 4594.51,3748.29 4594.51,3778.29 4598.82,3782.6 D3.2 4602.6,3782.6 4651.24,3733.96 4790.49,3733.96 4805,3748.46 4805,3801.54 4819.51,3816.04 4908.96,3816.04 ; 5039.84,3685.16 4908.96,3816.04 ; 5124.61,3724.53 5033.09,3816.04 4908.96,3816.04
  Bottom Layer w15: v1(4460,3740) 4495,3740 v1(4590,3645)
D-: *1.6 D3.3 USB-C1.A7 USB-C1.B7 | length 1928.1
  Top Layer w12: 5031.24,3665.47 USB-C1.B7 ; 5070.16,3704.84 USB-C1.A7
  Top Layer w15: *1.6 4500.59,4340 4563.76,4403.17 v1(4564.1,4403.17) ; v1(4610,3725.15) 4610,3722.84 4642.84,3690 v1(4715,3690) ; D3.3 4707.4,3782.6 v1(4720,3770) ; v1(4970,3690) 5006.72,3690 5031.24,3665.47 ; v1(5000,3775) 5070.16,3704.84
  Bottom Layer w15: v1(4564.1,4403.17) 4610,4357.27 v1(4610,3725.15) ; v1(4715,3690) 4715,3692.33 4720,3697.33 v1(4720,3770) 4992.67,3770 4997.67,3775 v1(5000,3775) 4970,3745 v1(4970,3690)
DTR: *1.13 Q1.2 R9.2 | length 1847.3
  Top Layer w15: R9.2 3757.46,3527.89 3757.46,3491.48 3792.6,3456.34 Q1.2 3830.37,3454.37 3839.15,3445.58 3839.15,3431.48 3900.63,3370 4173.99,3370 4545.69,3741.69 4545.69,4286.28 4699.41,4440 *1.13
EN: C11.2 J1.2 MD1.3 Q2.3 R7.1 S1.1 | length 2494.6
  Top Layer w15: J1.2 3146.14,4933.86 3146.14,4719.64 3190.81,4674.98 3193.92,4674.98 3213.7,4655.2 MD1.3 3245.57,4644.98 3270.34,4644.98 3287.22,4628.09 3287.22,3832.3 3271.99,3817.07 3271.99,3446.75 3309.09,3409.65 R7.1 ; C11.2 3442.97,3227.46 3391.62,3227.46 3372.39,3246.69 S1.1 3300,3394.65 R7.1 ; Q2.3 3448.34,3385.63 3441.43,3392.54 3332.11,3392.54 R7.1
GND: *1.1 C1.1 C2.1 C3.1 C4.1 C5.1 C6.1 C7.1 C8.1 C9.2 C10.2 C11.1 C12.1 C13.1 C14.1 C15.1 C16.1 C17.1 C18.1 C19.1 D3.1 J1.14 J2.1 J2.7 J3.2 J4.3 MD1.1 MD1.15 MD1.38 MD1.39 R1.1 R2.1 R6.1 R10.1 R11.1 S1.2 S2.2 U1.1 U2.1 U2.7 U3.3 U4.3 U5.3 U6.3 U7.3 USB-C1.A1 USB-C1.A12 USB-C1.B1 USB-C1.B12 USB-C1.S1@5397.32,3524.92 USB-C1.S2@5232.76,3524.92 USB-C1.S3 USB-C1.S4 | length 11331.4
  Top Layer w15: U3.3 2583.48,2745.04 2585.43,2746.99 2606.99,2746.99 C13.1 3294.57,2770 C7.1 ; U4.3 3000.6,2294.18 C14.1 3085,2288.58 v1(3085,2210) ; J1.14 3115.2,4055.2 MD1.15 ; MD1.1 3530,4755.2 ; S1.2 3412.76,3083.31 3464.02,3134.57 C11.1 C11.1@3465.98,3134.57 ; C1.1 3299.57,2875 C7.1 ; v1(3305,3680) 3335,3650 C8.1 ; v1(3380,2310) 3380,2347.72 3338.41,2389.31 3338.41,2396.16 C5.1 3303.58,2430.98 C6.1 3303.58,2760.98 C7.1 ; v1(3390,3550) 3390,3552.33 3398.58,3560.92 C8.1 ; v1(3495,3320) 3495,3317.67 3508.01,3304.66 3508.01,3170.73 3500.69,3163.41 3494.82,3163.41 C11.1@3465.98,3134.57 ; v1(3635,2285) 3595.63,2324.37 R2.1 3595.63,2431.89 3785.73,2621.99 3797.54,2621.99 3819.57,2644.02 C2.1 3819.57,2645.98 3680.55,2785 U1.1 3680.55,2857.81 3692.74,2870 C4.1 ; v1(3685,2120) 3731.42,2073.58 3781.81,2073.58 ; U5.3 3753.27,2045.04 3781.81,2073.58 ; v1(3765,4500) 3724.92,4459.92 MD1.39 ; S2.2@3767.6,3070.91 3752.4,3070.91 R1.1 3752.4,2938.15 3819.57,2870.98 C4.1 ; C3.1 C4.1 ; C15.1 3781.81,2073.58 ; J2.1 3970,5065 3970,4798.9 3926.3,4755.2 MD1.38 3530,4755.2 ; v1(4340,4695) 4341.65,4693.35 4351.57,4693.35 4454.92,4590 *1.1 ; R6.1 4430.47,3030.08 4418.29,3017.89 4413.37,3017.89 4352.66,2957.19 4293.1,2957.19 4284.31,2948.4 4284.31,2904.23 4260,2879.92 ; D3.1@4600.63,3843.62 D3.1 ; R10.1 4771.61,3780 4771.61,3930 R11.1 ; R10.1@4766.61,3784.84 4735.33,3816.13 4677.37,3816.13 4643.98,3849.53 D3.1 ; U7.3 4818.19,2880 4774.61,2836.42 C19.1 4681.99,2813.41 4676.12,2813.41 4400,2537.28 U6.3 4268.5,2449.92 C18.1 4260,2879.92 ; v1(5095,3405) 5095,3402.67 5111.61,3386.05 U2.1 5112.22,3229.74 5112.22,3206.97 5137.2,3181.99 U2.7 ; USB-C1.A1 5210.51,3564.49 5210,3565 5210,3536.18 5221.26,3524.92 USB-C1.S2@5232.76,3524.92 ; USB-C1.A12 5206.59,3826.89 5205,3828.48 5205,3885 4873.58,4216.42 C16.1 4626.59,4068.01 4626.59,4058.01 C17.1 4600.63,4032.05 D3.1 ; C8.1 3398.58,4327.87 MD1.39 ; C11.1@3465.98,3134.57 3707.91,3134.57 3764.17,3078.31 S2.2 3867.76,3078.31 3924.02,3134.57 C12.1 3925.98,3134.57 3973.23,3087.32 C9.2 4157.97,3084.82 4157.97,2981.95 4260,2879.92 ; 3530,4755.2 3530.63,4754.57 MD1.39
  Bottom Layer w15: J4.3@2280,3986.43 J4.3 ; v1(3380,2310) v1@3381.82,2310
IO0: C12.2 J2.14 MD1.25 Q1.3 S2.1 | length 1842.4
  Top Layer w15: C12.2 3822.09,3205.43 3785.83,3241.69 S2.1 3775,3318.66 3830,3373.66 Q1.3 3781.48,3424.15 3632.66,3424.15 3622.66,3434.15 3501.67,3434.15 3494.35,3441.48 3494.35,3501.99 3495,3502.64 3495,3563.15 3629.86,3698.01 3631.2,3698.01 3705,3771.81 3705,3927.2 3852.78,4074.98 3852.78,4078.09 3860.1,4085.41 3863.21,4085.41 3882.99,4105.2 3979.8,4105.2 J2.14
IO2: J2.15 MD1.24 | length 329.5
  Top Layer w15: MD1.24 3914.86,4044.98 3940.02,4044.98 J2.15
IO4: LS1.2 MD1.26 | length 1523.2
  Top Layer w15: MD1.26 4014.8,4155.2 v1(4040,4130)
  Bottom Layer w15: v1(4040,4130) 4040,2950.55 LS1.2
IO5: J2.10 MD1.29 | length 254.8
  Top Layer w15: MD1.29 4094.95,4305.2 4129.75,4340 J2.10
IO12: J1.13 MD1.14 | length 304.8
  Top Layer w15: J1.13 3065.2,4105.2 MD1.14
IO14: J1.12 MD1.13 U3.4 | length 2522.7
  Top Layer w15: U3.4 2531.46,2915.18 2425.51,3021.12 2288.88,3021.12 2200,3110 2200,3370 2330,3500 2330,3585 2229.11,3685.89 2229.11,4024.23 2314.89,4110 J1.12 3041.72,4110 3086.91,4155.2 MD1.13
IO15: J2.16 MD1.23 | length 379.3
  Top Layer w15: MD1.23 3926.3,4005.2 3946.08,3985.41 3949.19,3985.41 4081.36,3853.25 4081.36,3803.64 J2.16
IO16: MD1.28
IO17: MD1.27
IO18: J2.9 MD1.30 | length 275.5
  Top Layer w15: MD1.30 4060.2,4355.2 J2.9
IO19: J2.8 MD1.31 | length 296.2
  Top Layer w15: MD1.31 3911.03,4411.58 3966.52,4411.58 4085,4530.07 4135.07,4530.07 J2.8
IO23: J2.2 MD1.37 | length 548.9
  Top Layer w15: MD1.37 3926.3,4705.2 3946.08,4724.98 3949.19,4724.98 3981.36,4757.14 3981.36,4781.97 3990,4790.61 3990,4985 J2.2
IO25: J1.9 MD1.10 | length 308.8
  Top Layer w15: J1.9 2981.48,4398.52 3027.72,4398.52 3121.04,4305.2 MD1.10
IO26: J1.10 MD1.11 | length 288.1
  Top Layer w15: J1.10 3067.46,4310 3122.26,4255.2 MD1.11
IO32: J1.7 MD1.8 | length 350.2
  Top Layer w15: J1.7 3174.8,4405.2 MD1.8
IO33: J1.8 MD1.9 | length 329.5
  Top Layer w15: J1.8 3124.8,4355.2 MD1.9
IO34: J1.5 MD1.6 | length 429.2
  Top Layer w15: J1.5 3086.14,4693.86 3086.14,4629.64 3190.81,4524.98 3193.92,4524.98 3213.7,4505.2 MD1.6
IO35: J1.6 MD1.7 | length 379.2
  Top Layer w15: J1.6 2970,4695.79 3190.81,4474.98 3193.92,4474.98 3213.7,4455.2 MD1.7
NetD2_1: D2.1 R2.2 | length 76.7
  Top Layer w15: R2.2 D2.1
NetQ1_1: Q1.1 R8.1 | length 253.3
  Top Layer w15: R8.1 3740.35,3649.09 3808.31,3581.14 3808.31,3515.43 3867.4,3456.34 Q1.1
NetQ2_1: Q2.1 R9.1 | length 106.4
  Top Layer w15: Q2.1 3597.4,3466.34 3642.54,3511.48 3642.54,3527.89 R9.1
NetR10_2: R10.2 USB-C1.A5 | length 439.5
  Top Layer w12: 5168.19,3630 5182.72,3644.53 5183.98,3644.53 5185.24,3645.79 USB-C1.A5
  Top Layer w15: R10.2 4843.39,3765.16 4978.54,3630 5168.19,3630
NetR11_2: R11.2 USB-C1.B5 | length 428
  Top Layer w12: 5116.17,3763.9 USB-C1.B5
  Top Layer w15: R11.2 4945.07,3935 5116.17,3763.9
NetR12_1: R12.1 U2.2 | length 967.7
  Top Layer w15: R12.1 4490,3325.08 4522.19,3292.89 4573.92,3292.89 4581.24,3300.22 4581.24,3311.24 4600,3330 4776.21,3330 4785,3338.79 4785,3390 4835,3440 5125,3440 5140,3425 5140,3329.94 5137.2,3327.15 U2.2
NetU3_2: U3.2 U4.4 | length 789.2
  Top Layer w15: U3.2 2350.35,2745.04 2701.51,2393.88 2785.52,2393.88 2847.17,2455.53 2900.49,2455.53 2931.92,2424.1 U4.4
NetU4_2: U4.2 U5.4 | length 1091.1
  Top Layer w15: U4.2 2762.63,2294.18 2912.06,2144.74 3583.25,2144.74 3644.89,2206.39 3698.22,2206.39 3729.65,2174.96 U5.4
NetU5_2: U5.2 U6.4 | length 990.4
  Top Layer w15: U5.2 3658.26,2045.04 3688.47,2014.82 3880.64,2014.82 4185.81,2320 U6.4
NetU6_2: U6.2 U7.4 | length 405.3
  Top Layer w15: U6.2 4604.72,2449.92 4614.94,2460.14 4614.94,2471.95 4830,2687.01 U7.4
"PIR Signal": J4.2 MD1.12 | length 1002.9
  Top Layer w15: J4.2 2340,4260 3048.99,4260 3103.79,4205.2 MD1.12
RTS: *1.14 Q2.2 R8.2 | length 2246.2
  Top Layer w15: Q2.2 3522.6,3512.05 3659.65,3649.09 R8.2 3659.65,3660.91 3696.75,3698.01 3777.23,3698.01 4085.24,3390 4165.71,3390 4525.69,3749.98 4525.69,4316.28 4699.41,4490 *1.14
RXD0: *1.2 J2.5 MD1.34 | length 855.9
  Top Layer w15: MD1.34 3926.3,4555.2 3946.08,4574.98 3949.19,4574.98 4041.36,4667.14 4041.36,4736.36 J2.5 4302.25,4682.75 4312.17,4682.75 4454.92,4540 *1.2
SCK: J2.3 MD1.36 R3.1 U2.4 | length 2998.3
  Top Layer w15: MD1.36 3926.3,4655.2 3946.08,4674.98 3949.19,4674.98 4001.36,4727.14 4001.36,4773.69 4010,4782.33 4010,4905 J2.3 ; v1(4675,3560) 4775.47,3560 4778.37,3562.89 4783.29,3562.89 R3.1@4795.47,3575.08 ; R3.1 R3.1@4795.47,3575.08 ; U2.4 5188.39,3456.61 5135,3510 4860.55,3510 R3.1@4795.47,3575.08
  Bottom Layer w15: J2.3 4675,4510 v1(4675,3560)
SD0: J2.18 MD1.21 | length 479.3
  Top Layer w15: MD1.21 3926.3,3905.2 3946.08,3885.41 3949.19,3885.41 4041.36,3793.25 4041.36,3643.64 J2.18
SD1: J2.17 MD1.22 | length 429.3
  Top Layer w15: MD1.22 3914.86,3944.98 3939.63,3944.98 4061.36,3823.25 4061.36,3723.64 J2.17
SD2: J1.16 MD1.17 | length 369.6
  Top Layer w15: J1.16 3183.48,3923.48 3183.48,3928.09 3190.81,3935.41 3193.92,3935.41 3213.7,3955.2 MD1.17
SD3: J1.17 MD1.18 | length 419.6
  Top Layer w15: J1.17 3183.48,3823.48 3183.48,3878.09 3190.81,3885.41 3193.92,3885.41 3213.7,3905.2 MD1.18
SDI: J2.6 MD1.33 R4.1 U2.3 | length 2745.7
  Top Layer w15: MD1.33 3926.3,4505.2 3946.08,4524.98 3949.19,4524.98 3956.52,4532.3 3956.52,4551.52 J2.6 ; v1(4635,3490) 4635,3487.67 4655,3467.67 ; R4.1 4655,3467.67 ; U2.3 5162.8,3442.2 5137.33,3467.67 4655,3467.67
  Bottom Layer w15: J2.6 4329.38,4740 4645,4424.38 4645,3725.77 4630,3710.77 4630,3604.05 4635,3599.05 v1(4635,3490)
SERVO_PWM: J3.3 MD1.16 | length 1343.6
  Top Layer w15: J3.3 2271.82,3159.97 2271.82,3182.53 2949.29,3860 2990.71,3860 3135.91,4005.2 MD1.16
TXD0: *1.3 J2.4 MD1.35 | length 1118.2
  Top Layer w15: MD1.35 3926.3,4605.2 3946.08,4624.98 3949.19,4624.98 4021.36,4697.14 4021.36,4748.63 4030,4757.28 4030,4825 J2.4 4469.9,4615.1 4518.37,4615.1 4525.69,4607.78 4525.69,4515.1 4500.59,4490 *1.3
VBUS: C13.2 C14.2 C15.2 C17.2 C18.2 C19.2 D1.2 D3.4 J3.1 J4.1 LS1.1 R1.2 U3.1 U4.1 U5.1 U6.1 U7.1 USB-C1.A4 USB-C1.A9 USB-C1.B4 USB-C1.B9 | length 10056.4
  Top Layer w12: USB-C1.A4 USB-C1.B9
  Top Layer w15: v1(4510,2240) 4511.65,2241.65 4511.65,2250.55 U6.1@4581.1,2320 ; 5044.94,2772.11 5062.11,2772.11 v1(5100,2810) ; v1(5161.74,3795.39) USB-C1.A9
  Top Layer w20: J4.1 2200,4316.85 2200,3593.79 2210.44,3583.34 2218.51,3583.34 J3.1 2160,3441.85 2160,3053.5 2316.52,2896.99 2316.52,2885.18 2326.73,2874.96 U3.1 2455.04,2874.96 2487.76,2842.24 2567.2,2842.24 2568.79,2843.83 ; 2562.33,2840.83 2499.25,2777.76 2495.72,2777.76 2486.93,2768.97 2486.93,2721.11 2495.72,2712.32 2499.25,2712.32 2509.66,2701.92 2585.78,2701.92 2750.81,2536.88 ; 2569.79,2842.83 C13.2 ; U4.1 2750.81,2536.88 ; D1.2 D1.2@3508.66,2995 ; R1.2 D1.2@3508.66,2995 ; U6.1@4581.1,2320 4532.52,2368.58 ; D3.4 4679.37,4032.05 C17.2 4895,4035 5134.61,3795.39 v1(5161.74,3795.39) ; 5044.94,2772.11 5044.94,2760.3 5034.72,2750.08 U7.1 5011.1,2750.08 4976.18,2785 4796.46,2785 4775.05,2763.58 C19.2 4532.52,2591.1 4532.52,2368.58 ; v1(5125,3585) 5160,3585 ; 5160,3587.8 5177.03,3604.82 USB-C1.B9@5194.19,3604.82 ; 2750.81,2536.88 2909.54,2536.88 C14.2 3188.3,2406.42 3399.71,2195 3516.69,2195 ; D1.2@3508.66,2995 3525.18,2978.48 3525.18,2904.37 3526.94,2902.6 3535,2894.55 3535,2737.44 3510,2712.44 3510,2201.69 3516.69,2195 ; 3516.69,2195 3536.73,2174.96 U5.1 3560.35,2174.96 3625.39,2240 3741.42,2240 3773.74,2207.68 3777.2,2207.68 3785.98,2198.89 3785.98,2195.43 C15.2 3947.92,2146.42 4147.08,2345.57 4236.99,2345.57 C18.2 4532.52,2368.58
  Bottom Layer w15: LS1.1 4495,2220 4515,2240 v1(4510,2240) ; v1(5100,2810) 5030,2810 4920,2920 4915,2925 4760,2925 4450,3235 4450,3396.21 4458.79,3405 4645,3405 4670,3430 4670,3506.21 4678.79,3515 5055,3515 v1(5125,3585) 5125,3758.66 v1(5161.74,3795.39)
VN: J1.4 MD1.5 | length 479.2
  Top Layer w15: J1.4 3106.14,4773.86 3106.14,4659.64 3190.81,4574.98 3193.92,4574.98 3213.7,4555.2 MD1.5
VP: J1.3 MD1.4 | length 529.2
  Top Layer w15: J1.3 3126.14,4853.86 3126.14,4689.64 3190.81,4624.98 3193.92,4624.98 3213.7,4605.2 MD1.4
pads on no net: *1.7 *1.8 *1.9 *1.10 *1.11 *1.12 *1.15 J1.11 J1.15 J2.11 J2.12 J2.13 MD1.32 S1.MH1 S1.MH2 S2.MH1 S2.MH2 U7.2 USB-C1.A8 USB-C1.B8 USB-C1.S1@5397,3865 USB-C1.S1@5398,3525 USB-C1.S2@5232,3525 USB-C1.S2@5232,3865 USB-C1.Un1 USB-C1.Un2

## Polygon pours and split planes (outlines as drawn)
GND on Bottom Layer "GND_L02_P003" (solid, pour order 3): 1872.21,3702.79 ccw(c3672.21,3702.79) 3672.21,1902.79 ccw(c3672.21,3702.79) 5472.21,3702.79 ccw(c3672.21,3702.79) 3672.21,5502.79 ccw(c3672.21,3702.79)
3V3 on Top Layer "3V3_L01_P002" (solid, pour order 2): 1872.21,3707.79 ccw(c3672.21,3707.79) 3672.21,1907.79 ccw(c3672.21,3707.79) 5472.21,3707.79 ccw(c3672.21,3707.79) 3672.21,5507.79 ccw(c3672.21,3707.79)

## Keep-outs
Keep-Out Layer:
  circle w5: c3675,3705 r1800
  lines w5: 4987.21,3107.4 ccw(c4995,3107.8) 4994.05,3100.06 ccw(c4995,3107.84) 4994.59,3100.01 ccw(c4995,3107.93) 4995,3100 5036.38,3100 ccw(c5036.38,3107.93) 5036.78,3100.01 ccw(c5036.38,3107.8) 5044.12,3106.85 ccw(c5036.34,3107.79) 5044.17,3107.39 ccw(c5036.25,3107.8) 5044.18,3107.8 5044.18,3275.16 ccw(c5036.25,3275.16) 5044.17,3275.56 ccw(c5036.38,3275.16) 5037.34,3282.9 ccw(c5036.39,3275.12) 5036.79,3282.95 ccw(c5036.38,3275.03) 5036.38,3282.96 4995,3282.96 ccw(c4995,3275.03) 4994.6,3282.95 ccw(c4995,3275.16) 4987.26,3276.12 ccw(c4995.05,3275.17) 4987.21,3275.57 ccw(c4995.13,3275.16) 4987.2,3275.16 4987.2,3107.8 ccw(c4995.13,3107.8) 4987.21,3107.4 ; 5245.01,3107.24 cw(c5252.93,3107.64) 5245,3107.64 5245,3275 cw(c5252.93,3275) 5245.01,3275.41 cw(c5252.84,3275) 5245.06,3275.95 cw(c5252.8,3275) 5252.4,3282.79 cw(c5252.8,3274.87) 5252.8,3282.8 5294.18,3282.8 cw(c5294.18,3274.87) 5294.59,3282.79 cw(c5294.19,3274.95) 5295.14,3282.74 cw(c5294.18,3275) 5301.97,3275.4 cw(c5294.05,3275) 5301.98,3275 5301.98,3107.64 cw(c5294.05,3107.64) 5301.97,3107.23 cw(c5294.14,3107.63) 5301.92,3106.68 cw(c5294.18,3107.64) 5294.58,3099.85 cw(c5294.18,3107.77) 5294.18,3099.84 5252.8,3099.84 cw(c5252.8,3107.76) 5252.39,3099.85 cw(c5252.79,3107.68) 5251.85,3099.9 cw(c5252.8,3107.64) 5245.01,3107.24

## Other copper
Top Layer:
  pour cut-out: 5050,3330 5265,3330 5265,3075 5050,3075
Multi-Layer:
  pour cut-out: 3195,4755 3195,5150 3965,5150 3965,4755

## Silkscreen, mask and mechanical layers (free items; w line width, h text height)
Top Overlay:
  text "GND" at 4215,5215 h50
  text "3V3" at 2770,5185 h50
  text "IO23" at 4215,5115 h50
  text "EN" at 2825,5090 h50
  text "SCK" at 4215,5015 h50
  text "VP" at 2825,4980 h50
  text "TXD0" at 4215,4910 h50
  text "VN" at 2820,4885 h50
  text "RXD0" at 4220,4805 h50
  text "IO34" at 2735,4785 h50
  text "SDI" at 4220,4705 h50
  text "IO35" at 2735,4680 h50
  text "GND" at 4215,4605 h50
  text "IO32" at 2730,4580 h50
  text "PIR" at 2310,4555 h50
  text "IO19" at 4215,4505 h50
  text "IO33" at 2735,4480 h50
  text "IO18" at 4215,4410 h50
  text "5V" at 2505,4389.14 h50 r45
  text "IO25" at 2735,4385 h50
  text "IO5" at 4220,4305 h50
  text "IO26" at 2735,4280 h50
  text "Signal" at 2498.22,4165.92 h50 r45
  text "IO14" at 2743.39,4090.28 h50
  text "IO12" at 2745,3985 h50
  text "GND" at 2510,3934.14 h50 r45
  text "GND" at 2765,3880 h50
  text "IO2" at 4215,3810 h50
  text "ESP32" at 3680,3745 h50
  text "SERVO" at 2250,3705 h50
  text "IO15" at 4210,3705 h50
  text "SD2" at 2770,3680 h50
  text "SD1" at 4210,3600 h50
  text "SD3" at 2775,3580 h50
  text "5V" at 2480,3524.14 h50 r45
  text "SD0" at 4210,3500 h50
  text "CMD" at 2770,3475 h50
  text "CLK" at 4205,3395 h50
  text "5V" at 2820,3375 h50
  text "GND" at 2475,3314.14 h50 r45
  text "BME280" at 4610,3230 h50
  text "ADDR" at 4660,3155 h50
  text "RESET" at 3205,3095 h50 r90
  text "0x77" at 4665,3085 h50
  text "Signal" at 2473.22,3075.92 h50 r45
  text "BOOT" at 3685,3075 h50 r90
Bottom Overlay:
  drawing of 24 lines, arcs and shapes, not listed
  text "ALFREDO MAZARIEGOS" at 3980,4085 h50
  text "21000112" at 3750,3975 h50
  text "DYCDE 2023" at 3800,3865 h50